# Altium PCB Board.PcbDoc (part 1 of 2)
Units mm, origin at the board's own origin, x right, y up, seen from the top; angles counter-clockwise.
Board outline 55 x 40 mm, 4 copper layers (Top Layer, Internal Plane 1, Internal Plane 2, Bottom Layer), stack 1.641 mm thick; 72 components, 51 nets, 279 pads, 135 vias.
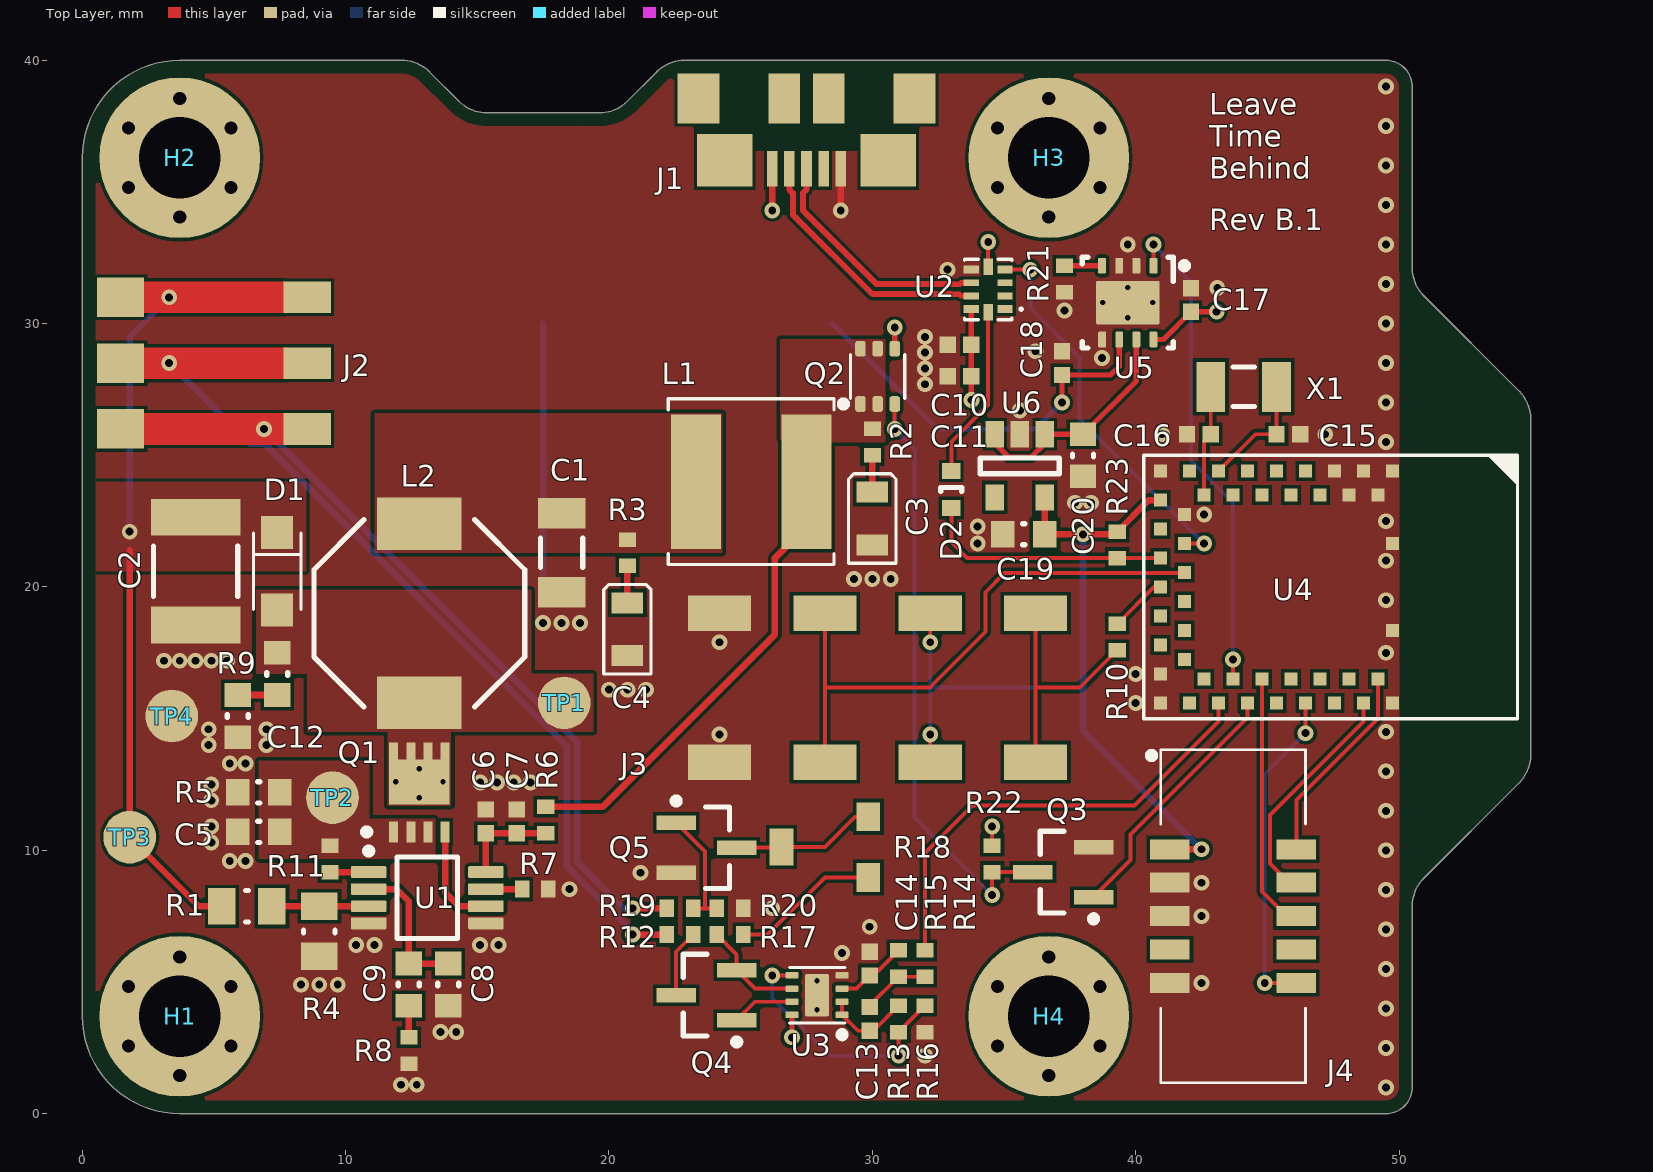
[diagram p0: Top Layer view]
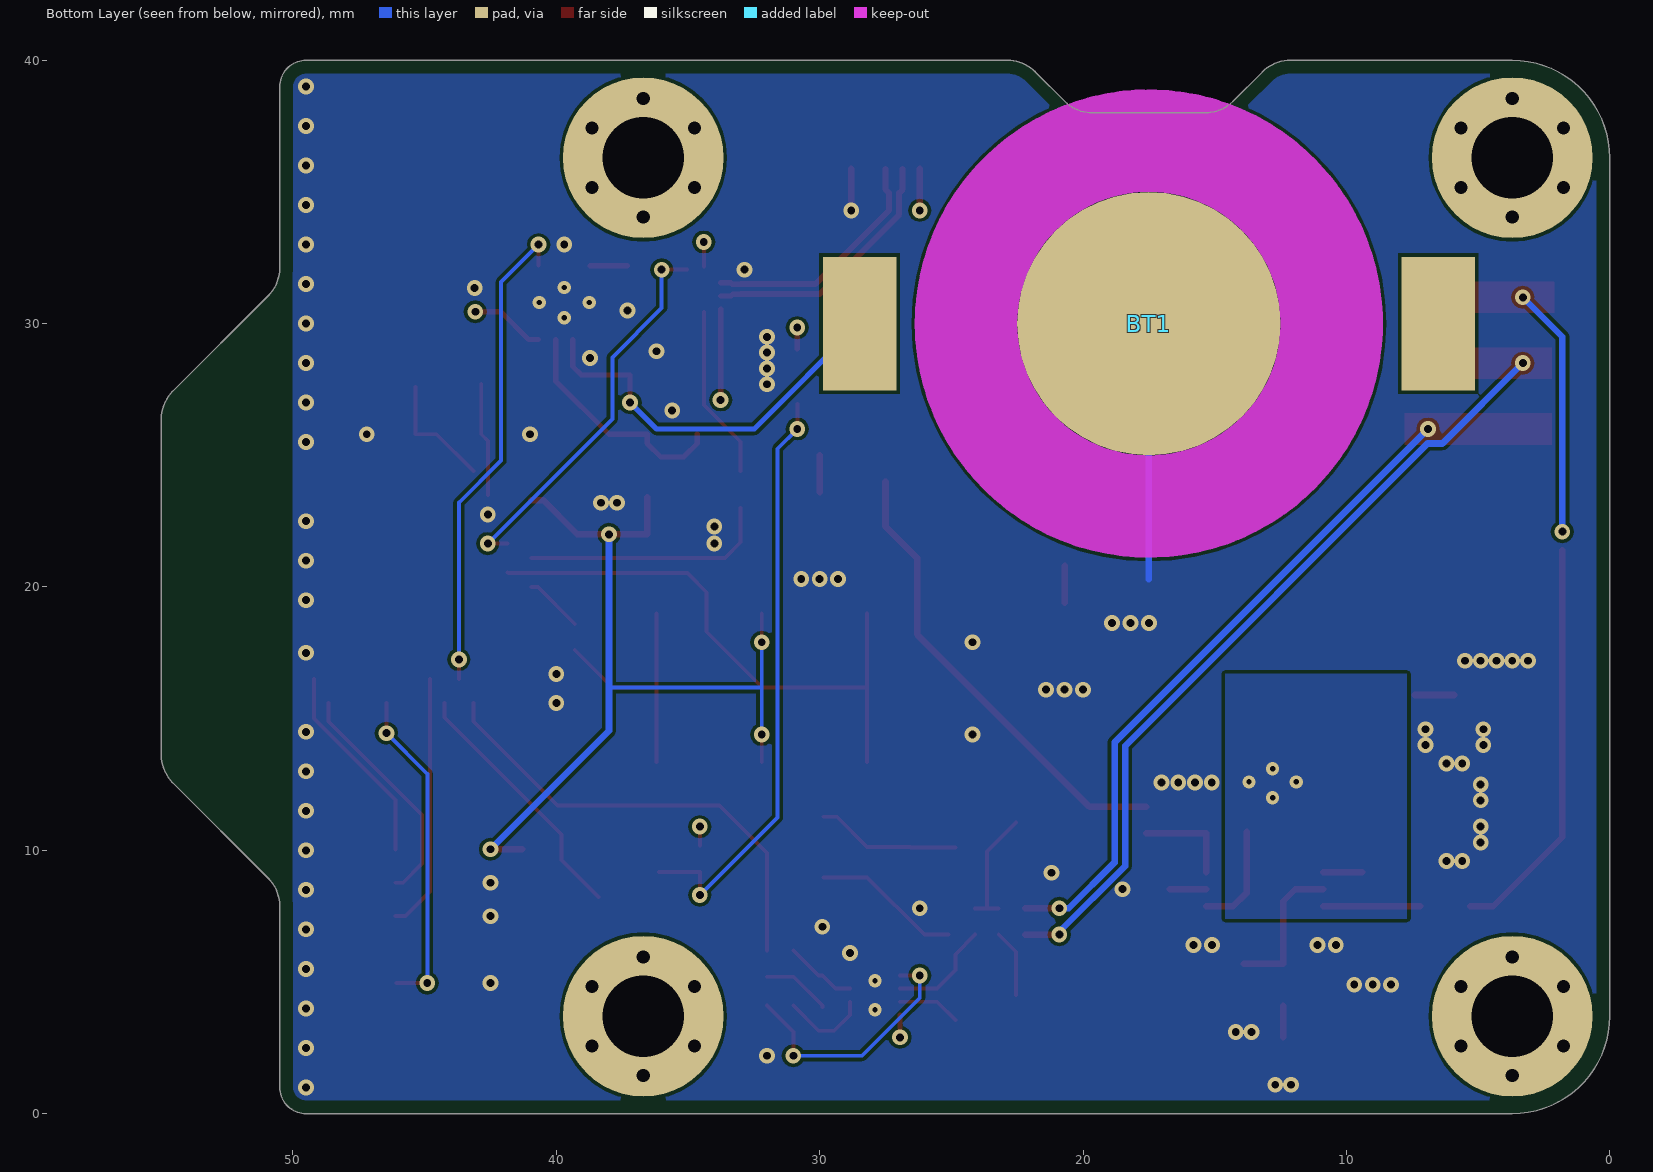
[diagram p1: Bottom Layer view, seen from below]
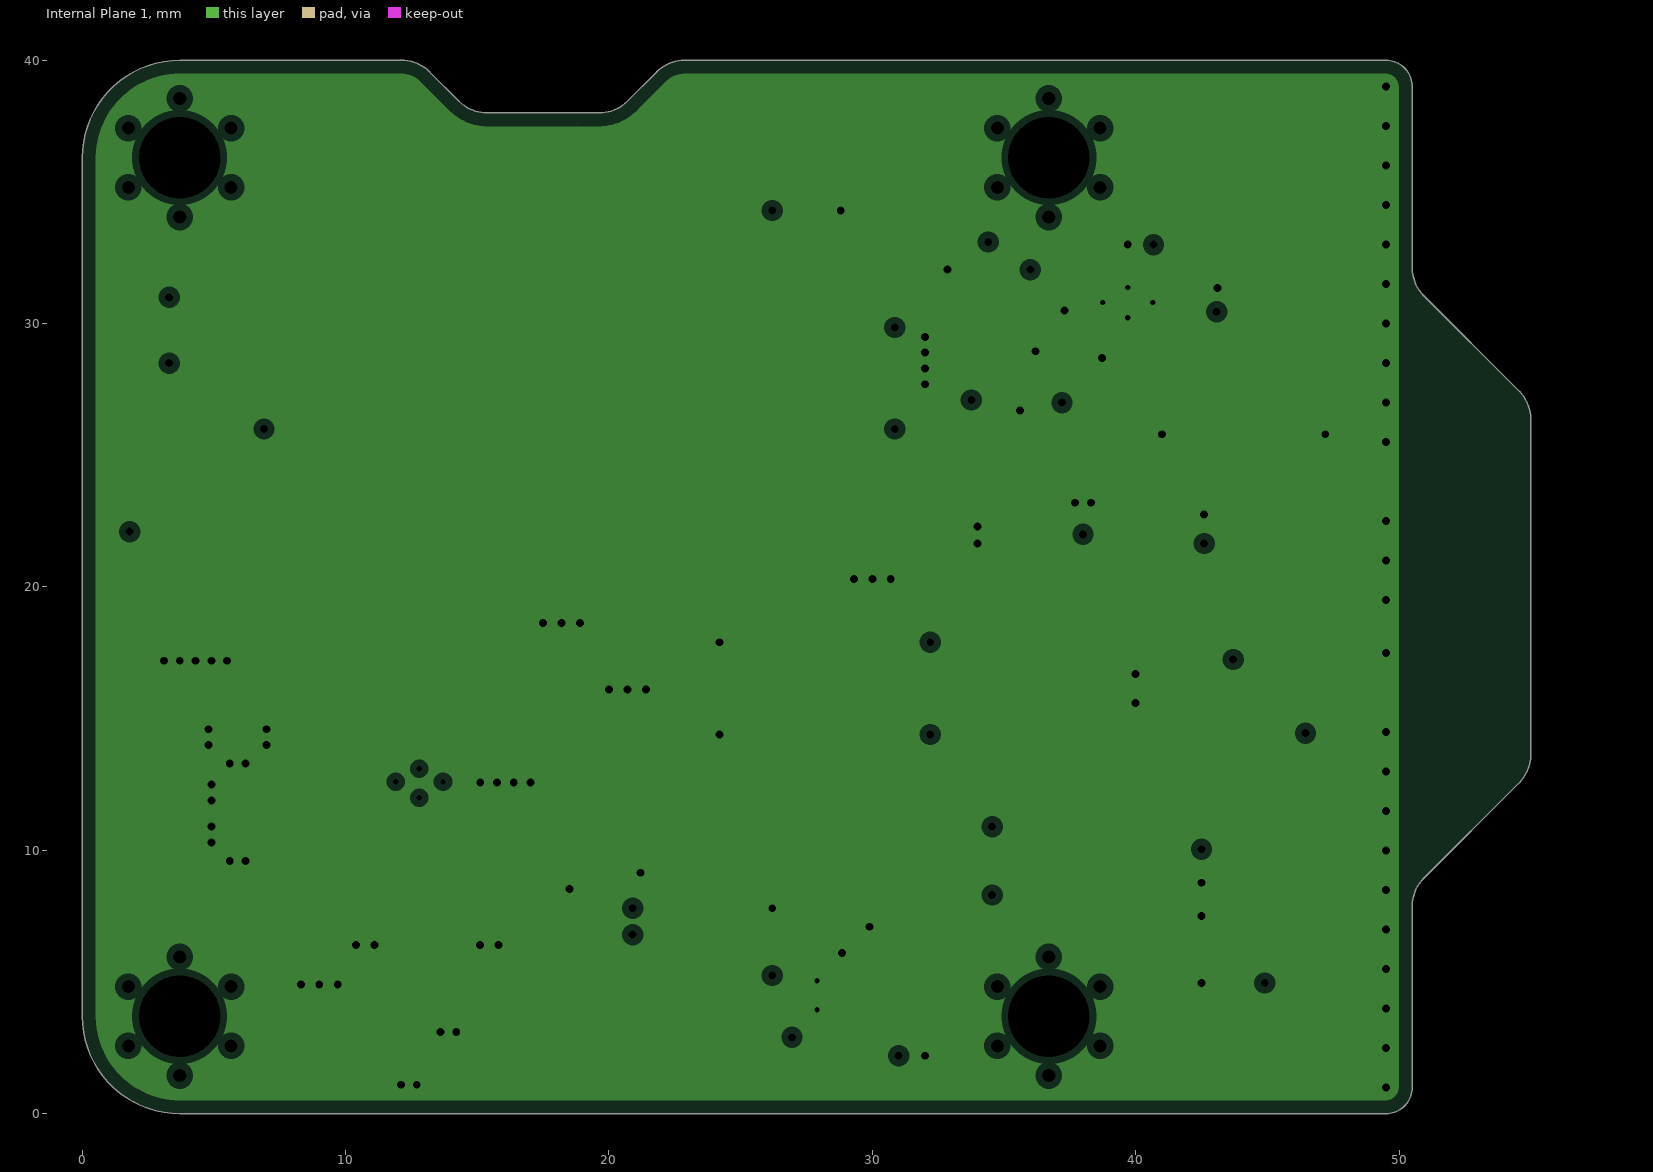
[diagram p2: Internal Plane 1, clearances drawn from the general rule]
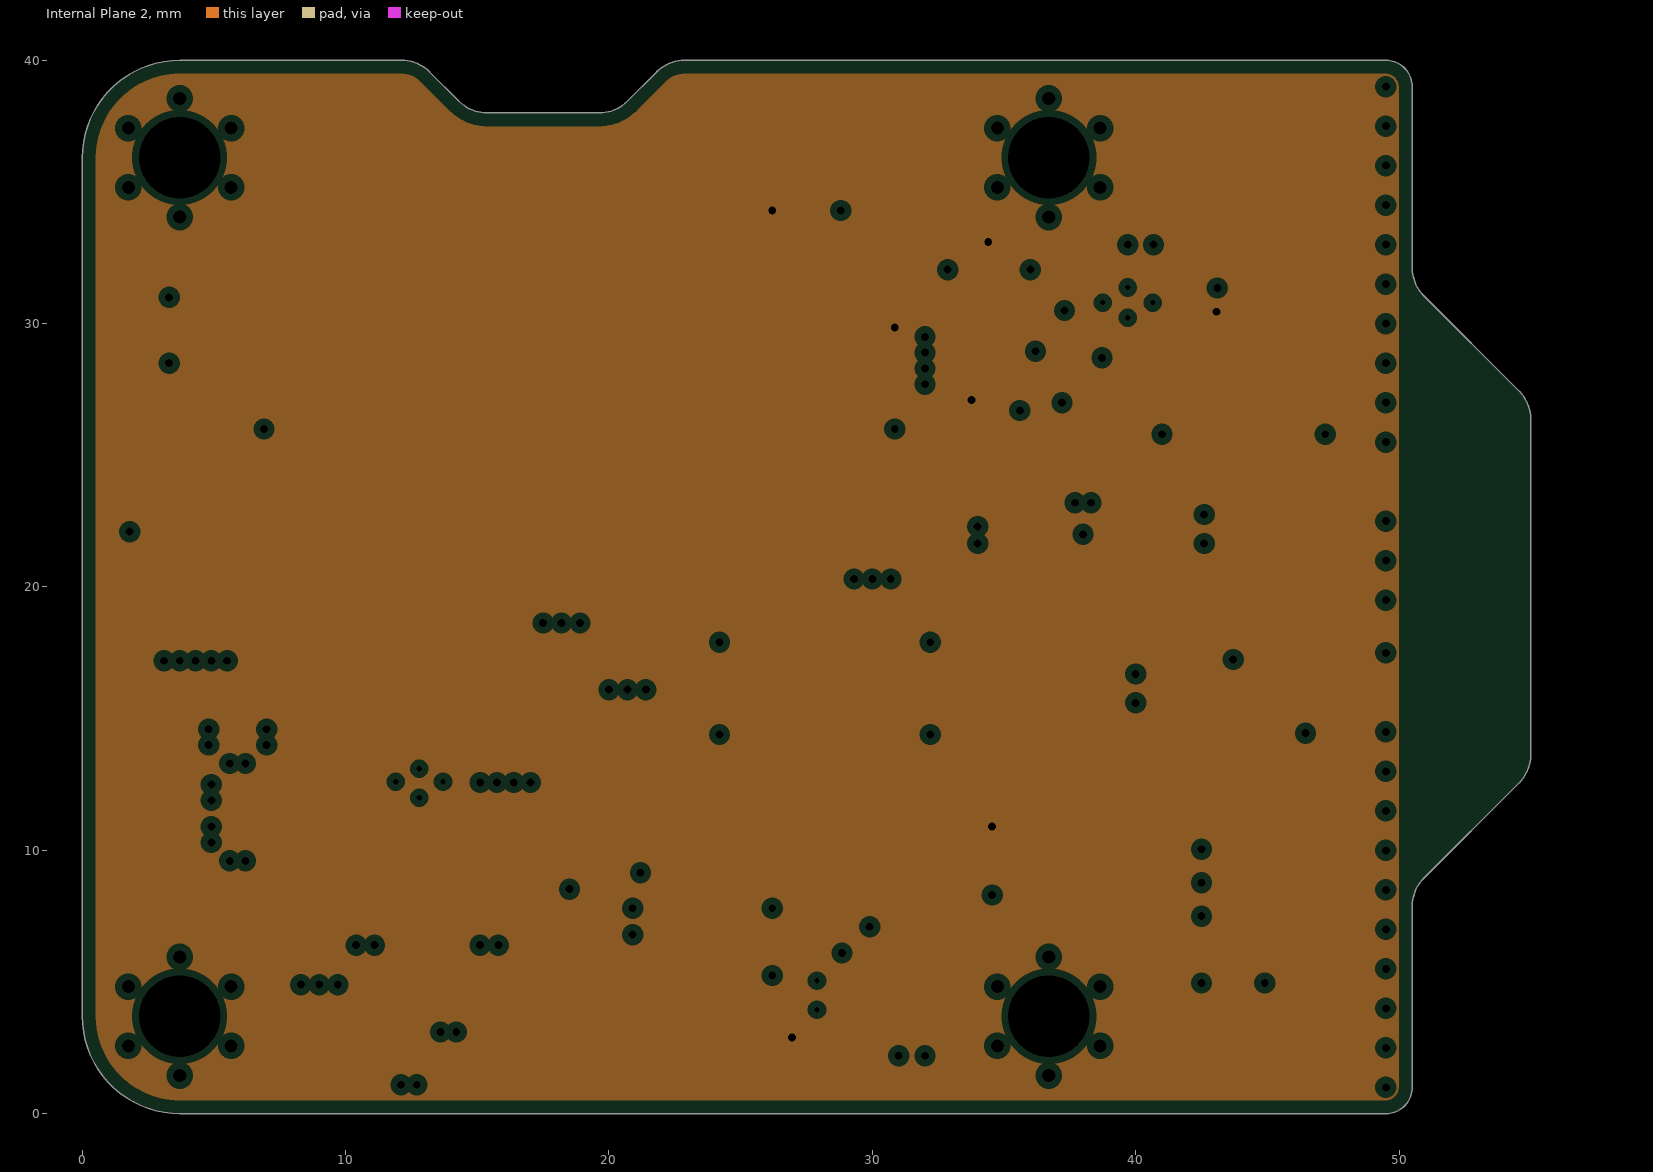
[diagram p3: Internal Plane 2, clearances drawn from the general rule]

## Layer stack, top to bottom
Top Solder: solder mask 0.0254, Solder Resist, Dk 3.5
Top Layer: signal copper 0.0356
Prepreg 1: prepreg 0.1702, FR-408, Dk 3.66
Internal Plane 1: plane copper 0.0178, net GND
Dielectric 1: core 1.1938, FR-408, Dk 3.66
Internal Plane 2: plane copper 0.0178, net Vbus
Prepreg 2: prepreg 0.1702, FR-408, Dk 3.66
Bottom Layer: signal copper 0.0356
Bottom Solder: solder mask 0.0254, Solder Resist, Dk 3.5

## Board outline
0,3.7 ccw(c3.7,3.7) 3.7,0 49.5,0 ccw(c49.5,1) 50.5,1 50.5,7.879 cw(c52,7.879) 50.94,8.939 54.561,12.561 ccw(c53.5,13.621) 55,13.621 55,26.379 ccw(c53.5,26.379) 54.561,27.439 50.94,31.061 cw(c52,32.121) 50.5,32.121 50.5,39 ccw(c49.5,39) 49.5,40 22.872,40 ccw(c22.872,38.5) 21.811,39.561 20.69,38.439 cw(c19.629,39.5) 19.629,38 15.372,38 cw(c15.372,39.5) 14.311,38.439 13.19,39.561 ccw(c12.129,38.5) 12.129,40 3.7,40 ccw(c3.7,36.3) 0,36.3

## Design rules (kind name [scope] priority, off if disabled: settings)
BoardOutlineClearance [All] p1: gap=0.5 ignorepadtopadclearanceinfootprint=FALSE
Clearance [All] p1: gap=0.127 ignorepadtopadclearanceinfootprint=FALSE except(0: Text-Text)
DiffPairsRouting [InDifferentialPair('USBD')] p1: maxlimit=0.203 minlimit=0.127 mostfreqgap=0.152 toplayer_minwidth=0.203 toplayer_maxwidth=0.254 toplayer_prefwidth=0.229 bottomlayer_minwidth=0.203 bottomlayer_maxwidth=0.254 bottomlayer_prefwidth=0.229 maxuncoupledlength=12.7
HoleSize [All] p1: absolutevalues=TRUE maxlimit=6.3 minlimit=0.2 maxpercent=80.000 minpercent=20.000
MinimumAnnularRing [All] p1: minimumring=0.076
MinimumSolderMaskSliver [All] p1: minsoldermaskwidth=0.102
PlaneClearance [All] p1: clearance=0.254
PlaneConnect [All] p1: pad.planeconnectstyle=Relief pad.reliefexpansion=0.508 pad.reliefentries=4 pad.reliefconductorwidth=0.254 pad.reliefairgap=0.254 via.planeconnectstyle=Direct via.reliefexpansion=0.508 via.reliefentries=4 via.reliefconductorwidth=0.254 via.reliefairgap=0.254
PolygonConnect [All] p1: thpad.connectstyle=Relief thpad.reliefconductorwidth=0.254 thpad.reliefentries=4 thpad.polygonreliefangle="45 Angle" thpad.airgapwidth=0.254 smdpad.connectstyle=Direct smdpad.reliefconductorwidth=0.254 smdpad.reliefentries=4 smdpad.polygonreliefangle="90 Angle" smdpad.airgapwidth=0.254 via.connectstyle=Direct via.reliefconductorwidth=0.254 via.reliefentries=4 via.polygonreliefangle="90 Angle" via.airgapwidth=0.254
RoutingVias [All] p1: holewidth=0.3 width=0.6 viastyle="Through Hole" minholewidth=0.2 minwidth=0.45 maxholewidth=6.3 maxwidth=1.27
SilkToSilkClearance [All] p1: silktosilkclearance=0.1
SilkToSolderMaskClearance [IsPad] p1: minsilkscreentomaskgap=0.1 clearancetoexposedcopper=TRUE
SolderMaskExpansion [All] p1: expansion=0.05
Width "Power nets" [InNetClass('Power')] p1: maxlimit=2.54 minlimit=0.127 preferedwidth=0.25 minimp=50.000000 maximp=50.000000 favimp=50.000000
Width "Logic nets" [InComponentClass('Driver') AND NOT InNetClass('Power')] p2: maxlimit=2.54 minlimit=0.127 preferedwidth=0.15 minimp=50.000000 maximp=50.000000 favimp=50.000000
Width [All] p3: maxlimit=2.54 minlimit=0.127 preferedwidth=0.2 minimp=50.000000 maximp=50.000000 favimp=50.000000
23 further rules are at their usual default settings.

## Classes and differential pairs
component class "Power supply": C1 C2 C3 C4 C5 C6 C7 C8 C9 C10 C11 C12 D1 L1 L2 Q1 Q2 Q3 R1 R2 R3 R4 R5 R6 R7 R8 R9 R11 R22 U1 U2
component class MCU: BT1 C15 C16 C17 C18 C19 C20 D2 R10 R21 R23 U4 U5 U6 X1
component class Driver: C13 C14 Q4 Q5 R12 R13 R14 R15 R16 R17 R18 R19 R20 U3
component class "Board connectors": H1 H2 H3 H4 J1 J2 J3 J4 TP1 TP2 TP3 TP4
differential pair USBD: +USBD_P -USBD_N

## Components (designator, comment, footprint, x,y, rotation, side; value= is the part's Value field where it differs from the comment)
BT1 "CR2032" BK-912 17.5,30 r0 bottom
C1 "10u" CAPC1206(3216)190_N 18.2,21.3 r90 top
C2 "100n" CAPC1812(4532)230_N 4.3,20.6 r90 top
C3 "22u" "KEMET A" 30,22.6 r270 top
C4 "100u" "KEMET A" 20.7,18.4 r270 top
C5 "100n" CAPC0603(1608)100_N 6.7,10.7 r0 top
C6 "100n" CAPC0402(1005)33_N 15.325,11.1 r270 top
C7 "1u" CAPC0402(1005)33_N 16.5,11.1 r270 top
C8 "DNP" CAPC0603(1608)100_N 13.9,4.9 r90 top
C9 "5.6n" CAPC0603(1608)100_N 12.4,4.9 r90 top
C10 "100n" CAPC0402(1005)33_N 33.31,28 r0 top
C11 "1u" CAPC0402(1005)33_N 33.31,29.2 r0 top
C12 "100p" CAPC0603(1608)100_N 5.9,15.1 r90 top
C13 "100n" CAPC0402(1005)60_N 29.9,3.6 r270 top
C14 "47n" CAPC0402(1005)60_N 29.9,5.7 r270 top
C15 "12p" CAPC0402(1005)60_N 45.8,25.8 r180 top
C16 "12p" CAPC0402(1005)60_N 42.4,25.8 r0 top
C17 "100n" CAPC0402(1005)33_N 42.1,30.9 r270 top
C18 "100n" CAPC0402(1005)33_N 37.2,28.5 r270 top
C19 "10u" CAPC0603(1608)100_N 35.75,22 r0 top
C20 "1u" CAPC0603(1608)100_N 38,25 r90 top
D1 "MBR2H200SF" SOD-123FL 7.4,20.6 r270 top
D2 "RB521S30" SOD-523 33,23.7 r270 top
H1 "M3 PLATED TIGHT FIT PAN HEAD" "M3 PLATED TIGHT PAN HEAD" 3.7,3.7 r0 top
H2 "M3 PLATED TIGHT FIT PAN HEAD" "M3 PLATED TIGHT PAN HEAD" 3.7,36.3 r0 top
H3 "M3 PLATED TIGHT FIT PAN HEAD" "M3 PLATED TIGHT PAN HEAD" 36.7,36.3 r0 top
H4 "M3 PLATED TIGHT FIT PAN HEAD" "M3 PLATED TIGHT PAN HEAD" 36.7,3.7 r0 top
J1 "ZX62R-B-5P(30)" HRS_ZX62R-B-5P(30)_ZX62R-B-5P(30)(PRIMARY) 27.5,38.55 r180 top
J2 "009276003021106" 009276003021106 5,28.5 r270 top
J3 "009296004553906" 009296004553906 30.2,16.175 r180 top
J4 "3220-10-0300-00" 3220-10-0300-00 43.7,7.5 r0 top
L1 "10u" VLS6045EX 25.4,24 r180 top
L2 "15u" SRU8043 12.8,19 r270 top
Q1 "BSZ900N20NS3" PG-TSDSON-8 12.8,12.2 r90 top
Q2 "MCH6351-TL-W" SOT23-6P65_210X90L25X32 30.2,28 r0 top
Q3 "BSR202N" INF-PG-SC59_N 37.25,9.175 r180 top
Q4 "BSR606N" INF-PG-SC59_N 23.7,4.5 r180 top
Q5 "BSR606N" INF-PG-SC59_N 23.7,10.1 r0 top
R1 "1.5M" RESC0805(2012)_N 6.25,7.875 r180 top
R2 "500m" RESC0402(1005)_N 30,25.5 r90 top
R3 "200m" RESC0402(1005)_N 20.7,21.3 r90 top
R4 "12.7k" RESC0805(2012)_N 9,6.925 r90 top
R5 "39m" RESC0603(1608)_N 6.7,12.2 r0 top
R6 "20" RESC0402(1005)_N 17.6,11.15 r90 top
R7 "180k" RESC0402(1005)_N 17.2,8.525 r180 top
R8 "4.3k" RESC0402(1005)_N 12.4,2.4 r90 top
R9 "5.62" RESC0603(1608)_N 7.4,16.7 r90 top
R10 "220" RESC0402(1005)_N 39.3,18.1 r90 top
R11 "470" RESC0402(1005)_N 9.4,9.675 r90 top
R12 "3k" RESC0402(1005)_N 22.7,6.8 r180 top
R13 "18k" RESC0402(1005)_N 31,3.6 r270 top
R14 "300k" RESC0402(1005)_N 32,5.7 r270 top
R15 "180k" RESC0402(1005)_N 31,5.7 r90 top
R16 "2k" RESC0402(1005)_N 32,3.6 r90 top
R17 "68" RESC0402(1005)_N 24.6,6.8 r180 top
R18 "20" PVG3A 28.2,10.125 r90 top
R19 "330k" RESC0402(1005)_N 22.7,7.8 r180 top
R20 "30k" RESC0402(1005)_N 24.6,7.8 r180 top
R21 "2k" RESC0402(1005)_N 37.3,31.7 r90 top
R22 "100k" RESC0402(1005)_N 34.55,9.675 r90 top
R23 "100k" RESC0402(1005)_N 39.3,21.6 r90 top
TP1 "SMD test point" "2MM SMD TEST POINT" 18.3,15.6 r0 top
TP2 "SMD test point" "2MM SMD TEST POINT" 9.5,12 r0 top
TP3 "SMD test point" "2MM SMD TEST POINT" 1.8,10.5 r0 top
TP4 "SMD test point" "2MM SMD TEST POINT" 3.4,15.1 r0 top
U1 "LM3478MM/NOPB" DGK0008A_N 13.1,8.2 r0 top
U2 "BQ24392RSER" QFN50P200X150X60-10N 34.4,31.3 r180 top value=Value
U3 "TLV9062" WSON-8 27.9,4.5 r90 top
U4 "BMD-300" BMD-300 41.85,17.25 r180 top locked
U5 "TPS2113ADRBR" VSON-8 39.7,30.8 r270 top
U6 "NCP114-3.3V" TSOP-5 35.6,24.6 r270 top
X1 "32.768kHz" "3215 XTAL" 44.1,27.6 r0 top

## Footprints (in the part's own frame and the unit in brackets; to place one, negate y for a bottom-side part, rotate by r counter-clockwise, add the part's x,y. Pads: shape width x height; smd on the part's side, far side on the other; paste and mask are expansions set on the pad)
"2MM SMD TEST POINT" [mm]
  round 2 smd paste-2: 1(0,0)
"3215 XTAL" [mm]
  rect 1.1x1.9 smd: 1(-1.25,0) 2(1.25,0)
  silkscreen extent -0.4,-0.75 0.4,0.75, body extent -1.6,-0.75 1.6,0.75, height 0.81
3220-10-0300-00 [mm] "IDC BOX HEADER, SMT, 0.050\" (1.27MM), 10 CONTACTS"
  rect 1.5x0.76 smd: 1(-2.4,2.54) 2(2.4,2.54) 3(-2.4,1.27) 4(2.4,1.27) 5(-2.4,0) 6(2.4,0) 7(-2.4,-1.27) 8(2.4,-1.27) 9(-2.4,-2.54) 10(2.4,-2.54)
  silkscreen extent -3.15,-6.33 2.75,6.32, body extent -2.75,-6.33 2.75,6.32, height 5.6
009276003021106 [mm] "CONN TERM BLOCK 3 POS WTB"
  rect 1.2x1.8 smd: 1(-2.5,3.55) 2(0,3.55) 3(2.5,3.55)
  rect 1.5x1.8 smd: 1(-2.5,-3.55) 2(0,-3.55) 3(2.5,-3.55)
  Top Layer region: 1.9,-2.8 3.1,-2.8 3.1,2.8 1.9,2.8
  Top Layer region: -0.6,-2.8 0.6,-2.8 0.6,2.8 -0.6,2.8
  Top Layer region: -3.1,-2.9 -1.9,-2.9 -1.9,2.7 -3.1,2.7
  body extent -3.7,-4.7 3.8,4.3, height 5.1
009296004553906 [mm] "CONN 4POS SMD 18-26AWG"
  rect 2.4x1.35 smd: 1(-6,-2.825) 1(-6,2.825) 2(-2,2.825) 2(-2,-2.825) 3(2,2.825) 3(2,-2.825) 4(6,-2.825) 4(6,2.825)
  body extent -8,-3.3 8,3.3, height 9
BK-912 [mm]
  rect 2.79x5.08 smd: 1(-10.985,0) 1(10.985,0)
  round 10 smd paste-20 mask+3.89: 2(0,0)
  Top Layer keep-out circle w3.89: c0,0 r6.945
  body extent -11.43,-7.88 11.43,7.37, height 4.32
BMD-300 [mm] "BMD-300, LGA, 47pin ,1.1mm Pitch, 14mm x 9.8mm"
  rect 0.49x0.49 smd: 1(-7.9,-7.15) 2(-7.35,-6.25) 3(-6.8,-7.15) 4(-6.25,-6.25) 5(-5.7,-7.15) 6(-5.15,-6.25) 7(-4.6,-7.15) 8(-4.05,-6.25) 9(-3.5,-7.15) 10(-2.95,-6.25) 11(-2.4,-7.15) 12(-1.85,-6.25) 13(-1.3,-7.15) 14(-0.75,-6.25) 15(-0.2,-7.15) 16(0.9,-7.15) 17(0.9,-6.05) 18(0,-5.5) 19(0.9,-4.95) 20(0,-4.4) 21(0.9,-3.85) 22(0,-3.3) 23(0.9,-2.75) 24(0,-2.2) 25(0.9,-1.65) 26(0,-1.1) 27(0.9,-0.55) 28(0,0) 29(0.9,0.55) 30(0.9,1.65) 31(-0.2,1.65) 32(-0.75,0.75) 33(-1.3,1.65) 34(-1.85,0.75) 35(-2.4,1.65) 36(-2.95,0.75) 37(-3.5,1.65) 38(-4.05,0.75) 39(-4.6,1.65) 40(-5.15,0.75) 41(-5.7,1.65) 42(-6.25,0.75) 43(-6.8,1.65) 44(-7.35,0.75) 45(-7.9,1.65) 46(-7.9,-1.1) 47(-7.9,-4.4)
  Multi-Layer pour cut-out: -8.15,-7.65 -8.15,2.15 -12.55,2.15 -12.55,-7.65
  silkscreen extent -12.65,-7.75 1.55,2.25, body extent -12.55,-7.65 1.45,2.15, height 1.89
CAPC0402(1005)33_N [mm] "Chip Capacitor, Body 1.0x0.5mm, Height 0.33mm, IPC Medium Density"
  rect 0.62x0.62 smd: 1(-0.45,0) 2(0.45,0)
  body extent -0.55,-0.3 0.55,0.3, height 0.33
CAPC0402(1005)60_N [mm] "Chip Capacitor, Body 1.0x0.5mm, Height 0.6mm, IPC Medium Density"
  rect 0.62x0.62 smd: 1(-0.45,0) 2(0.45,0)
  body extent -0.55,-0.3 0.55,0.3, height 0.6
CAPC0603(1608)100_N [mm]
  rect 0.9x1 smd: 1(-0.8,0) 2(0.8,0)
  silkscreen extent -0.05,-0.4 0.05,0.4, body extent -0.87,-0.48 0.88,0.47, height 1
CAPC1206(3216)190_N [mm] "Chip Capacitor, Body 3.2x1.6mm, Height 1.9mm, IPC Medium Density"
  rect 1.15x1.8 smd: 1(-1.5,0) 2(1.5,0)
  silkscreen extent -0.55,-0.8 0.55,0.8, body extent -1.7,-0.9 1.7,0.9, height 1.9
CAPC1812(4532)230_N [mm] "Chip Capacitor, Body 4.5x3.2mm, Height 2.3mm, IPC Medium Density"
  rect 1.4x3.4 smd: 1(-2.05,0) 2(2.05,0)
  silkscreen extent -0.95,-1.6 0.95,1.6, body extent -2.4,-1.7 2.4,1.7, height 2.3
DGK0008A_N [mm] "TSOP, 8-Leads, Body 3.1x3.1mm, Pitch 0.65mm, IPC Medium Density"
  rrect22% 1.35x0.45 smd: 1(-2.225,0.975) 2(-2.225,0.325) 3(-2.225,-0.325) 4(-2.225,-0.975) 5(2.225,-0.975) 6(2.225,-0.325) 7(2.225,0.325) 8(2.225,0.975)
  silkscreen extent -2.35,-1.55 1.15,1.9, body extent -2.45,-1.5 2.45,1.5, height 0.94
HRS_ZX62R-B-5P(30)_ZX62R-B-5P(30)(PRIMARY) [mm]
  rect 0.4x1.35 smd: 1(1.3,2.675) 2(0.65,2.675) 3(0,2.675) 4(-0.65,2.675) 5(-1.3,2.675)
  rect 2.1x2 smd: S1(-3.1,2.35) S2(3.1,2.35)
  rect 1.6x1.9 smd: S3(4.1,0) S6(-4.1,0)
  rect 1.2x1.9 smd: S4(0.85,0) S5(-0.85,0)
  Top Layer pour cut-out: -3.75,-1.45 -3.75,2 3.75,2 3.75,-1.45
  body extent -4.4,-2.7 4.4,3.03, height 2.76
INF-PG-SC59_N [mm] "SOT23, 3-Leads, Body 3x1.53mm, Pitch 0.95mm, IPC Medium Density"
  rect 1.5x0.55 smd: 1(-1.15,0.95) 2(-1.15,-0.95) 3(1.15,0)
  silkscreen extent -1.28,-1.55 0.87,1.9, body extent -0.87,-1.55 0.87,1.55, height 1.35
"KEMET A" [mm]
  rect 0.8x1.2 smd: 1(-1,0) 2(1,0)
  silkscreen extent -1.7,-0.9 1.7,0.9, body extent -1.7,-0.9 1.7,0.9, height 1.8
"M3 PLATED TIGHT PAN HEAD" [mm] "M3 x 0.5mm plated tight fit pan head"
  round 0.5 hole 0.5: ""(-1.95,-1.125) ""(-1.95,1.125) ""(0,-2.25) ""(0,2.25) ""(1.95,-1.125) ""(1.95,1.125)
  round 6.1 hole 3.1 paste+0: ""(0,0)
PG-TSDSON-8 [mm] "PG-TSDSON-8"
  rect 0.8x0.34 smd: 1(-1.5,0.975) 2(-1.5,0.325) 3(-1.5,-0.325) 4(-1.5,-0.975)
  rect 0.65x0.34 smd: 5(1.575,-0.975) 6(1.575,-0.325) 7(1.575,0.325) 8(1.575,0.975)
  rect 1.71x2.29 smd paste-2: 9(0.395,0)
  silkscreen extent -1.62,1.88 -1.38,2.12, body extent -1.65,-1.65 1.65,1.65, height 4.85
PVG3A [mm] "SMD Sealed Type Single-Turn PVG3"
  rect 1.1x0.9 smd: 1(1.15,-1.65) 3(-1.15,-1.65)
  rect 1.4x0.9 smd: 2(0,1.65)
  body extent -1.8,-1.8 1.8,1.8, height 1.94
QFN50P200X150X60-10N [mm]
  rect 0.58x0.3 smd: 1(-0.64,0.75) 4(-0.64,-0.75) 6(0.64,-0.75) 9(0.64,0.75)
  rect 0.58x0.25 smd: 2(-0.64,0.25) 3(-0.64,-0.25) 7(0.64,-0.25) 8(0.64,0.25)
  rect 0.35x0.63 smd: 5(0,-0.86) 10(0,0.86)
  silkscreen extent -1.3,-1.15 0.9,1.15, body extent -0.75,-1 0.75,1, height 0.55
RESC0402(1005)_N [mm] "Chip Resistor, Body 1.0x0.5mm, IPC Medium Density"
  rect 0.55x0.65 smd: 1(-0.5,0) 2(0.5,0)
  body extent -0.52,-0.27 0.53,0.28, height 0.4
RESC0603(1608)_N [mm] "Chip Resistor, Body 1.6x0.8mm, IPC Medium Density"
  rect 0.9x1 smd: 1(-0.8,0) 2(0.8,0)
  silkscreen extent -0.05,-0.4 0.05,0.4, body extent -0.85,-0.47 0.85,0.47, height 0.6
RESC0805(2012)_N [mm] "Chip Resistor, Body 2.0x1.3mm, IPC Medium Density"
  rect 1.05x1.4 smd: 1(-0.95,0) 2(0.95,0)
  silkscreen extent -0.05,-0.6 0.05,0.6, body extent -1.1,-0.67 1.1,0.68, height 0.7
SOD-123FL [mm]
  rect 1.25x1.22 smd: A(1.475,0) K(-1.475,0)
  silkscreen extent -1.45,-0.9 1.45,0.9, body extent -1.8,-0.82 1.8,0.83, height 0.98
SOD-523 [mm] "SOD, 2-Leads, Body 1.2x0.8mm"
  rect 0.6x0.7 smd: 1(-0.7,0) 2(0.7,0)
  silkscreen extent -0.07,-0.4 0.07,0.4, body extent -0.6,-0.4 0.6,0.4, height 0.7
SOT23-6P65_210X90L25X32 [mm]
  rrect50% 0.4x0.6 smd: 1(-0.65,-1.05) 2(0,-1.05) 3(0.65,-1.05) 4(0.65,1.05) 5(0,1.05) 6(-0.65,1.05)
  silkscreen extent -1.42,-1.17 1.03,0.83, body extent -1,-1.1 1,1.1, height 0.9
SRU8043 [mm]
  rect 2x3.2 smd: 1(-3.4,0) 2(3.4,0)
  silkscreen extent -3.56,-4 3.56,4, body extent -4,-4 4,4, height 5.2
TSOP-5 [mm] "SOP, 5-Leads, Body 3x1.5mm, Pitch 0.95mm"
  rect 1x0.7 smd: 1(-1.2,0.95) 2(-1.2,0) 3(-1.2,-0.95) 4(1.2,-0.95) 5(1.2,0.95)
  silkscreen extent -0.3,-1.5 0.3,1.5, body extent -0.75,-1.5 0.75,1.5, height 1.1
VLS6045EX [mm]
  rect 1.9x5.1 smd: 1(-2.1,0) 2(2.1,0)
  silkscreen extent -3.15,-3.15 3.15,3.15, body extent -3,-3 3,3, height 4.53
VSON-8 [mm] "SON, 8-Leads, Body 3x3mm, Pitch 0.65mm, Thermal Pad 2.4x1.65mm, TI Recommended"
  rrect33% 0.6x0.3 smd: 1(-1.4,0.975) 2(-1.4,0.325) 3(-1.4,-0.325) 4(-1.4,-0.975) 5(1.4,-0.975) 6(1.4,-0.325) 7(1.4,0.325) 8(1.4,0.975)
  rrect6% 1.65x2.4 smd paste-1.2: 9(0,0)
  silkscreen extent -1.73,-1.73 1.73,2.28, body extent -1.5,-1.5 1.5,1.5, height 0.96
WSON-8 [mm] "WSON-8"
  rrect40% 0.25x0.5 smd mask+0.07: 1(-0.75,-0.95) 2(-0.25,-0.95) 3(0.25,-0.95) 4(0.75,-0.95) 5(0.75,0.95) 6(0.25,0.95) 7(-0.25,0.95) 8(-0.75,0.95)
  rrect11% 1.6x0.9 smd paste-1 mask+0.07: 9(0,0)
  silkscreen extent -1.62,-1.08 1.05,1.05, body extent -1,-1.05 1,1.05, height 0.77

## Part data
BT1: library part BK-912, "BATTERY RETAINER COIN 20MM SMD", Case/Package=SMD/SMT, Manufacturer="Memory Protection Devices", Manufacturer Part Number=BK-912-TR, Package Quantity=700, Supplier Part Number 1=BK-912-CT-ND, ComponentLink1Description=https://media.digikey.com/pdf/Data%20Sheets/Memory%20Protection%20PDFs/Coin_Cell_Guide.pdf, ComponentLink1URL=https://media.digikey.com/pdf/Data%20Sheets/Memory%20Protection%20PDFs/Coin_Cell_Guide.pdf, Mount="PCB,Surface Mount", Number of Cells=1, Pricing 1="1=0.73, 10=0.661, 100=0.5138 (USD)", Stock 1=39032, Supplier 1=Digi-Key, Termination=SMD/SMT
C1: library part C3216X7R1E106K160AB, "CAP CER 10UF 25V X7R 1206", Manufacturer="TDK Corporation", Operating Temperature="-55°C ~ 125°C", Package / Case="1206 (3216 Metric)", Ratings=-, Supplier Part Number 1=445-7705-1-ND, Temperature Coefficient=X7R, Tolerance=±10%, Voltage - Rated=25V, Applications="General Purpose", Category=Capacitors, ComponentLink1Description=https://product.tdk.com/info/en/catalog/datasheets/mlcc_commercial_general_en.pdf, ComponentLink1URL=https://product.tdk.com/info/en/catalog/datasheets/mlcc_commercial_general_en.pdf, Failure Rate=-, Features="Low ESL", Height - Seated (Max)=-, Lead Spacing=-, Lead Style=-, Manufacturer Part Number=C3216X7R1E106K160AB, Mounting Type="Surface Mount, MLCC", Notification="Current market demand for these product types have resulted in fluctuating and extending lead times. Lead times may differ.", Packaging="Cut Tape (CT)", Part Status=Active, Pricing 1="1=0.83, 10=0.589, 100=0.3881, 500=0.2875, 1000=0.24438 (USD)", RoHS="RoHS Compliant", Size / Dimension="0.126\" L x 0.063\" W (3.20mm x 1.60mm)", Stock 1=20000, Supplier 1=Digi-Key, Supplier 2=Mouser, Supplier Part Number 2=810-C3216X7R1E106K, Thickness (Max)="0.075\" (1.90mm)"
C2: library part C1812C104J2GACAUTO, "KEMET         C1812C104J2GACAUTO            SMD Multilayer Ceramic Capacitor, AEC-Q200 C Series, 0.1 F,  5%, C0G / NP0, 200 V", Capacitance=100nF, Case/Package=1812, Case Code (Metric)=4532, Dielectric=C0G, Dielectric Material=Ceramic, Manufacturer=KEMET, Max Operating Temperature=125°C, Min Operating Temperature=-55°C, Package Quantity=500, Ratings=AEC-Q200, Supplier Part Number 1=399-11585-1-ND, Temperature Coefficient=30ppm/°C, Tolerance=5%, Voltage=200V, Case Code (Imperial)=1812, ComponentLink1Description=http://www.farnell.com/datasheets/1929048.pdf, ComponentLink1URL=http://www.farnell.com/datasheets/1929048.pdf, Depth=3.2mm, Height=2mm, Lead Free="Lead Free", Length=4.5mm, Manufacturer Part Number=C1812C104J2GACAUTO, Mount="Surface Mount", Packaging="Tape and Reel", Pricing 1="1=2.08, 10=1.679, 100=1.2824 (USD)", REACH SVHC="No SVHC", Stock 1=5000, Supplier 1=Digi-Key, Termination=SMD/SMT, Thickness=0.087inch, Voltage Rating=200V, Voltage Rating (DC)=200V, Weight=0.000952oz, Width=3.2mm
C3: library part T520A226M006ATE100, "CAP TANT POLY 22UF 6.3V 1206", Supplier Part Number 1=399-5271-1-ND, Supplier 1=Digi-Key, Supplier 2=Mouser, Supplier Part Number 2=80-T520A226M6ATE100
C4: library part T520A107M006ATE045, "POLY TA SMD 3216 100UF 6.3V 20%", Supplier Part Number 1=399-18160-1-ND, Supplier 1=Digi-Key, Supplier 2=Mouser, Supplier Part Number 2=80-T520A107M06ATE045
C5: library part C0603C104K8RACTU, "CAP CER 0.1UF 10V X7R 0603", Capacitance=100nF, Case/Package=0603, Case Code (Metric)=1608, Dielectric=X7R, Dielectric Material=Ceramic, Manufacturer=KEMET, Max Operating Temperature=125°C, Min Operating Temperature=-55°C, Package Quantity=1, Supplier Part Number 1=399-1095-1-ND, Tolerance=10%, Voltage=10V, Case Code (Imperial)=0603, ComponentLink1Description=http://www.farnell.com/datasheets/2315110.pdf, ComponentLink1URL=http://www.farnell.com/datasheets/2315110.pdf, ComponentLink2Description=http://www.kemet.com/kemet/web/homepage/kechome.nsf/vapubfiles/KEM_C1002_X7R_SMD.pdf/$file/KEM_C1002_X7R_SMD.pdf, ComponentLink2URL=http://www.kemet.com/kemet/web/homepage/kechome.nsf/vapubfiles/KEM_C1002_X7R_SMD.pdf/$file/KEM_C1002_X7R_SMD.pdf, ComponentLink3Description=https://www.verical.com/server-webapp/html/getDatasheet?partID=91529, ComponentLink3URL=https://www.verical.com/server-webapp/html/getDatasheet?partID=91529, ComponentLink4Description=http://www.mouser.com/ds/2/212/KEM_C1002_X7R_SMD-1102033.pdf, ComponentLink4URL=http://www.mouser.com/ds/2/212/KEM_C1002_X7R_SMD-1102033.pdf, ComponentLink5Description=http://www.alliedelec.com/m/d/9bfe7773041ffe9d406e68bc7b377fdd.pdf, ComponentLink5URL=http://www.alliedelec.com/m/d/9bfe7773041ffe9d406e68bc7b377fdd.pdf, ComponentLink6Description=http://www.farnell.com/datasheets/1851736.pdf, ComponentLink6URL=http://www.farnell.com/datasheets/1851736.pdf, Contact Plating=Matte,Tin, Depth=0.8mm, Dissipation Factor=5%, Height=0.8mm, Lead Pitch=0.7mm, Length=1.6mm, Manufacturer Part Number=C0603C104K8RACTU, Mount="PCB,Surface Mount", Number of Pins=2, Packaging="Tape and Reel", Pricing 1="1=0.16, 10=0.112, 100=0.0525, 500=0.03682, 1000=0.03049 (USD)", Radiation Hardening=No, REACH SVHC="No SVHC", Stock 1=40000, Supplier 1=Digi-Key, Termination=SMD/SMT, Thickness=0.034inch, Voltage Rating=10V, Voltage Rating (DC)=10V, Width=0.8mm
C6 C10 C17 C18: library part CC0402KRX7R8BB104, "CAP CER 0.1UF 25V X7R 0402", Manufacturer=Yageo, Operating Temperature="-55°C ~ 125°C", Package / Case="0402 (1005 Metric)", Ratings=-, Supplier Part Number 1=311-2077-1-ND, Temperature Coefficient=X7R, Tolerance=±10%, Voltage - Rated=25V, Applications="General Purpose", Category=Capacitors, ComponentLink1Description=http://www.yageo.com/documents/recent/UPY-GPHC_X7R_6.3V-to-50V_18.pdf, ComponentLink1URL=http://www.yageo.com/documents/recent/UPY-GPHC_X7R_6.3V-to-50V_18.pdf, Failure Rate=-, Features=-, Height - Seated (Max)=-, Lead Spacing=-, Lead Style=-, Manufacturer Part Number=CC0402KRX7R8BB104, Mounting Type="Surface Mount, MLCC", Notification="Current market demand for these product types have resulted in fluctuating and extending lead times. Lead times may differ.", Packaging="Cut Tape (CT)", Part Status=Active, Pricing 1="1=0.1, 10=0.048, 100=0.0215, 500=0.01534, 1000=0.01205, 2500=0.01095, 5000=0.01007 (USD)", RoHS="RoHS Compliant", Size / Dimension="0.039\" L x 0.020\" W (1.00mm x 0.50mm)", Stock 1=0, Supplier 1=Digi-Key, Supplier 2=Mouser, Supplier Part Number 2=603-CC402KRX7R8BB104, Thickness (Max)="0.022\" (0.55mm)"
C7 C11: library part CGB2A1X5R1E105K033BC, "CAP CER 1UF 25V X5R 0402", Supplier Part Number 1=445-13185-1-ND, Supplier 1=Digi-Key, Supplier 2=Mouser, Supplier Part Number 2=810-CGB2A1X5R1E105BC
C8: library part "0402 DNP JUMPER"
C9: library part GRM1885C1H562JA01D, "Multilayer Ceramic Capacitors MLCC - SMD/SMT 0603 5,600pF 50volts C0G +/-5%", Capacitance=5.6nF, Case/Package=0603, Case Code (Metric)=1608, Dielectric=C0G, Manufacturer=Murata, Max Operating Temperature=125°C, Min Operating Temperature=-55°C, Package Quantity=4000, Supplier Part Number 1=490-11471-1-ND, Tolerance=5%, Voltage Rating=50V, Case Code (Imperial)=0603, ComponentLink1Description=http://search.murata.co.jp/Ceramy/image/img/A01X/partnumbering_e_01.pdf, ComponentLink1URL=http://search.murata.co.jp/Ceramy/image/img/A01X/partnumbering_e_01.pdf, Depth=0.8mm, Height=0.8mm, Lead Free="Lead Free", Lead Pitch=0.5mm, Length=1.6mm, Manufacturer Part Number=GRM1885C1H562JA01D, Mount="Surface Mount", Packaging="Tape and Reel", Pricing 1="1=0.19, 10=0.135, 100=0.0635, 500=0.04454, 1000=0.03687 (USD)", Stock 1=40000, Supplier 1=Digi-Key, Termination=SMD/SMT, Thickness=0.035inch, Voltage Rating (DC)=50V, Width=0.031inch
C12: library part C0603C101JAGACTU, "CAP CER 100PF 250V C0G/NP0 0603", Capacitance=100pF, Case/Package=0603, Dielectric Material=Ceramic, Manufacturer=KEMET, Supplier Part Number 1=399-14933-1-ND, Tolerance=5%, Voltage Rating (DC)=250V, Lead Free="Lead Free", Manufacturer Part Number=C0603C101JAGACTU, Pricing 1="1=0.56, 10=0.397, 100=0.2612, 500=0.1935, 1000=0.16448 (USD)", Pricing 2="1=0.54, 10=0.313, 50=0.313, 100=0.189, 1000=0.155, 10000=0.135 (USD)", Stock 1=7181, Stock 2=0, Supplier 1=Digi-Key, Supplier 2=Mouser, Supplier Part Number 2=80-C0603C101JAG
C13: library part AC0402KRX7R7BB104, "CAP CER 0.1UF 16V X7R 0402", Manufacturer=Yageo, Operating Temperature="-55°C ~ 125°C", Package / Case="0402 (1005 Metric)", Ratings=AEC-Q200, Supplier Part Number 1=311-3026-1-ND, Temperature Coefficient=X7R, Tolerance=±10%, Voltage - Rated=16V, Applications=Automotive, Category=Capacitors, ComponentLink1Description=http://www.yageo.com/documents/recent/UPY-AC_NP0X7R_16V-to-630V_11.pdf, ComponentLink1URL=http://www.yageo.com/documents/recent/UPY-AC_NP0X7R_16V-to-630V_11.pdf, Failure Rate=-, Features=-, Height - Seated (Max)=-, Lead Spacing=-, Lead Style=-, Manufacturer Part Number=AC0402KRX7R7BB104, Mounting Type="Surface Mount, MLCC", Packaging="Cut Tape (CT)", Part Status=Active, Pricing 1="1=0.1, 10=0.068, 100=0.0304, 500=0.02174, 1000=0.01708, 2500=0.01553, 5000=0.01429 (USD)", RoHS="RoHS Compliant", Size / Dimension="0.039\" L x 0.020\" W (1.00mm x 0.50mm)", Stock 1=29133, Supplier 1=Digi-Key, Thickness (Max)="0.022\" (0.55mm)"
C14: library part AC0402KRX7R7BB473, "CAP CER 0.047UF 16V X7R 0402", Manufacturer=Yageo, Operating Temperature="-55°C ~ 125°C", Package / Case="0402 (1005 Metric)", Ratings=AEC-Q200, Supplier Part Number 1=311-3064-1-ND, Temperature Coefficient=X7R, Tolerance=±10%, Voltage - Rated=16V, Applications=Automotive, Category=Capacitors, ComponentLink1Description=http://www.yageo.com/documents/recent/UPY-AC_NP0X7R_16V-to-630V_11.pdf, ComponentLink1URL=http://www.yageo.com/documents/recent/UPY-AC_NP0X7R_16V-to-630V_11.pdf, Failure Rate=-, Features=-, Height - Seated (Max)=-, Lead Spacing=-, Lead Style=-, Manufacturer Part Number=AC0402KRX7R7BB473, Mounting Type="Surface Mount, MLCC", Packaging="Cut Tape (CT)", Part Status=Active, Pricing 1="1=0.13, 10=0.093, 100=0.0416, 500=0.0297, 1000=0.02334, 2500=0.02122, 5000=0.01952 (USD)", RoHS="RoHS Compliant", Size / Dimension="0.039\" L x 0.020\" W (1.00mm x 0.50mm)", Stock 1=7700, Supplier 1=Digi-Key, Thickness (Max)="0.022\" (0.55mm)"
C15 C16: library part CC0402FRNPO9BN120, "CAP CER 12PF 50V C0G/NPO 0402", Manufacturer=Yageo, Operating Temperature="-55°C ~ 125°C", Package / Case="0402 (1005 Metric)", Ratings=-, Supplier Part Number 1=311-1641-1-ND, Temperature Coefficient="C0G, NP0", Tolerance=±1%, Voltage - Rated=50V, Applications="General Purpose", Category=Capacitors, ComponentLink1Description=http://www.yageo.com/documents/recent/UPY-GP_NP0_16V-to-50V_16.pdf, ComponentLink1URL=http://www.yageo.com/documents/recent/UPY-GP_NP0_16V-to-50V_16.pdf, Failure Rate=-, Features=-, Height - Seated (Max)=-, Lead Spacing=-, Lead Style=-, Manufacturer Part Number=CC0402FRNPO9BN120, Mounting Type="Surface Mount, MLCC", Notification="Current market demand for these product types have resulted in fluctuating and extending lead times. Lead times may differ.", Packaging="Cut Tape (CT)", Part Status=Active, Pricing 1="1=0.14, 10=0.104, 100=0.0464, 500=0.03312, 1000=0.02603, 2500=0.02366, 5000=0.02177 (USD)", RoHS="RoHS Compliant", Size / Dimension="0.039\" L x 0.020\" W (1.00mm x 0.50mm)", Stock 1=100000, Supplier 1=Digi-Key, Thickness (Max)="0.022\" (0.55mm)"
C19: library part GRM188R61C106KAALD, "Multilayer Ceramic Capacitors MLCC - SMD/SMT 0603 10uF 16volts X5R 10%", Capacitance=10uF, Case/Package=0603, Case Code (Metric)=1608, Dielectric=X5R, Manufacturer=Murata, Max Operating Temperature=85°C, Min Operating Temperature=-55°C, Package Quantity=4000, Supplier Part Number 1=490-10728-1-ND, Tolerance=10%, Voltage Rating=16V, Case Code (Imperial)=0603, Composition=Ceramic, Height=0.8mm, Lead Free="Lead Free", Length=0.063inch, Manufacturer Part Number=GRM188R61C106KAALD, Mount="Surface Mount", Packaging="Tape and Reel", Pricing 1="1=0.49, 10=0.339, 100=0.2036, 500=0.15266, 1000=0.12892 (USD)", REACH SVHC="No SVHC", Stock 1=0, Supplier 1=Digi-Key, Termination=SMD/SMT, Thickness=0.037inch, Voltage Rating (DC)=16V, Weight=0.000222oz, Width=0.8mm
C20: library part CL10B105MO8NNWC, "CAP CER 1UF 16V X7R 0603", Manufacturer="Samsung Electro-Mechanics", Operating Temperature="-55°C ~ 125°C", Package / Case="0603 (1608 Metric)", Ratings=-, Supplier Part Number 1=1276-6524-1-ND, Temperature Coefficient=X7R, Tolerance=±20%, Voltage - Rated=16V, Applications="General Purpose", Category=Capacitors, ComponentLink1Description=http://www.samsungsem.com/kr/support/product-search/mlcc/CL10B105MO8NNWC.jsp, ComponentLink1URL=http://www.samsungsem.com/kr/support/product-search/mlcc/CL10B105MO8NNWC.jsp, Features=-, Height - Seated (Max)=-, Lead Spacing=-, Lead Style=-, Manufacturer Part Number=CL10B105MO8NNWC, Mounting Type="Surface Mount, MLCC", Notification="Current market demand for these product types have resulted in fluctuating and extending lead times. Lead times may differ.", Packaging="Cut Tape (CT)", Part Status=Active, Pricing 1="1=0.1, 10=0.043, 100=0.0194, 500=0.01406, 1000=0.01121 (USD)", RoHS="RoHS Compliant", Size / Dimension="0.063\" L x 0.031\" W (1.60mm x 0.80mm)", Stock 1=40000, Supplier 1=Digi-Key, Thickness (Max)="0.035\" (0.90mm)"
D1: "DIODE SCHOTTKY 200V 2A SOD123", Average Rectified Current=2A, Manufacturer="ON Semiconductor", Manufacturer Part Number=MBR2H200SFT3G, Max Reverse Voltage (DC)=200V, Supplier Part Number 1=MBR2H200SFT3GOSCT-ND, Lead Free="Lead Free", Mount="Surface Mount", Packaging="Tape and Reel", Pricing 1="1=0.44, 10=0.328, 100=0.1857, 500=0.12298, 1000=0.09428 (USD)", Stock 1=78470, Supplier 1=Digi-Key
D2: "DIODE SCHOTTKY 30V 200MA SOD523F", Average Rectified Current=200mA, Forward Voltage=500mV, Manufacturer="ON Semiconductor / Fairchild", Max Operating Temperature=125°C, Max Repetitive Reverse Voltage (Vrrm)=30V, Max Reverse Leakage Current=30uA, Min Operating Temperature=-55°C, Package Quantity=1, Power Dissipation=200mW, Supplier Part Number 1=RB521S30CT-ND, ComponentLink1Description=http://www.fairchildsemi.com/ds/RB/RB521S30.pdf, ComponentLink1URL=http://www.fairchildsemi.com/ds/RB/RB521S30.pdf, ComponentLink2Description=https://www.fairchildsemi.com/datasheets/RB/RB521S30.pdf, ComponentLink2URL=https://www.fairchildsemi.com/datasheets/RB/RB521S30.pdf, ComponentLink3Description=https://www.verical.com/server-webapp/html/getDatasheet?partID=71229, ComponentLink3URL=https://www.verical.com/server-webapp/html/getDatasheet?partID=71229, Element Configuration=Single, Forward Current=200mA, Height=0.7mm, Lead Free="Lead Free", Length=1.3mm, Manufacturer Part Number=RB521S30, Max Reverse Voltage (DC)=30V, Mount="Surface Mount", Number of Pins=2, Packaging="Tape and Reel", Peak Reverse Current=30uA, Pricing 1="1=0.23, 10=0.191, 100=0.1011, 500=0.0665, 1000=0.04522 (USD)", Radiation Hardening=No, REACH SVHC="No SVHC", Stock 1=44826, Supplier 1=Digi-Key, Weight=0.01g, Width=0.9mm
H1 H2 H3 H4: "M3 x 0.5mm plated tight fit pan head"
J1: "HIROSE(HRS)         ZX62R-B-5P(30)             USB Connector, Micro USB Type B, USB 2.0, Receptacle, 5 Ways, Surface Mount, Right Angle", Manufacturer=Hirose, Supplier Part Number 1=H125274CT-ND, Connector Type=USB, Contact Material="Copper Alloy", Contact Plating=Gold, Gender=Receptacle, Lead Free="Lead Free", Manufacturer Part Number=ZX62R-B-5P(30), Mount="Horizontal,Surface Mount", Number of Contacts=5, Orientation="Right Angle", Packaging="Tape and Reel", Pricing 1="1=1.02, 10=0.898, 25=0.8448, 50=0.8096, 100=0.7744, 250=0.704, 500=0.6336, 1000=0.5632 (USD)", REACH SVHC=Unknown, Stock 1=50674, Supplier 1=Digi-Key, USB Standard="USB 2.0"
J2: "CONN TERM BLOCK 3 POS WTB", Colour=White, Current=6A, Manufacturer=Kyocera, Max Operating Temperature=125°C, Max Supply Voltage (AC)=250V, Min Operating Temperature=-40°C, Package Quantity=1, Supplier Part Number 1=478-6170-1-ND, ComponentLink1Description=https://media.digikey.com/pdf/Data%20Sheets/AVX%20PDFs/00927600x021x06_Spec.PDF, ComponentLink1URL=https://media.digikey.com/pdf/Data%20Sheets/AVX%20PDFs/00927600x021x06_Spec.PDF, ComponentLink2Description=http://www.farnell.com/datasheets/2003050.pdf, ComponentLink2URL=http://www.farnell.com/datasheets/2003050.pdf, ComponentLink3Description=http://www.avx.com/docs/Catalogs/9276.pdf, ComponentLink3URL=http://www.avx.com/docs/Catalogs/9276.pdf, ComponentLink4Description=//media.digikey.com/pdf/Data%20Sheets/AVX%20PDFs/00927600x021x06_Spec.PDF, ComponentLink4URL=//media.digikey.com/pdf/Data%20Sheets/AVX%20PDFs/00927600x021x06_Spec.PDF, Contact Material="Copper,Copper Alloy", Contact Plating=Tin, Depth=9mm, Gender=Receptacle, Height=5mm, Housing Colour=White, Housing Material=Nylon, Lead Free="Lead Free", Length=9mm, Manufacturer Part Number=009276003021106, Max Voltage Rating (AC)=250V, Mount="Surface Mount,Through Hole", Number of Circuits=3, Number of Contacts=3, Number of Levels=1, Number of Positions=3, Number of Positions Per Level=3, Number of Rows=1, Orientation="Right Angle", Packaging="Tape and Reel", Pitch=2.5mm, Radiation Hardening=No, REACH SVHC="No SVHC", Stock 1=0, Supplier 1=Digi-Key, Termination=Solder, Voltage=250V, Voltage Rating=250V, Width=7.5mm, Wire Gauge (Max)=24AWG, Wire Gauge (Min)=18AWG
J3: "Headers & Wire Housings 4WAY POKE HOME VERTICAL TOP MOUNT", Colour=White, Current Rating=7A, Flammability Rating="UL94 V-0", Manufacturer="Kyocera AVX", Max Operating Temperature=125°C, Min Operating Temperature=-40°C, Package Quantity=400, Supplier Part Number 1=478-9323-1-ND, Voltage Rating=200V, Cable Pitch=0.157inch, ComponentLink1Description=http://datasheets.avx.com/PokeHomeVerticalTop_00-9296.pdf, ComponentLink1URL=http://datasheets.avx.com/PokeHomeVerticalTop_00-9296.pdf, Connector Type=Poke-In, Contact Gender=Female, Contact Material="Copper Alloy", Contact Plating=Tin, Housing Material=Nylon, Lead Free="Lead Free", Manufacturer Part Number=009296004553906, Mount="Surface Mount", Number of Positions=4, Number of Rows=1, Packaging="Tape and Reel", Pitch=4mm, Pricing 1="1=1.2, 10=1.057, 100=0.9123 (USD)", Stock 1=2302, Supplier 1=Digi-Key, Termination=SMD/SMT, Wire/Cable Gauge=18AWG, Wire Gauge (Max)=26AWG, Wire Gauge (Min)=18AWG
J4: "IDC BOX HEADER 0.050 10 POS", Manufacturer="CNC Tech", Package Quantity=3200, Supplier Part Number 1=1175-1629-ND, ComponentLink1Description=http://cnctech.us/idcmatching2.pdf, ComponentLink1URL=http://cnctech.us/idcmatching2.pdf, Connector Type="Male Pin", Contact Plating=Gold, Manufacturer Part Number=3220-10-0300-00, Mount="Surface Mount", Number of Positions=10, Number of Rows=2, Packaging=Tray, Pitch=0.05inch, Pricing 1="1=0.74, 10=0.69, 100=0.529, 500=0.46, 3200=0.345, 6400=0.3335, 12800=0.3059 (USD)", Row Spacing=0.05inch, Stock 1=193314, Supplier 1=Digi-Key, Termination=Solder
L1: library part VLS6045EX-100M, "FIXED IND 10UH 3.4A 61 MOHM SMD", Supplier Part Number 1=445-173039-1-ND, Supplier 1=Digi-Key, Supplier 2=Mouser, Supplier Part Number 2=810-VLS6045EX-100M
L2: library part SRU8043-150Y, "FIXED IND 15UH 2.7A 46 MOHM SMD", Case/Package=Nonstandard, Current Rating=2.7A, DC Resistance (DCR)=46mR, Inductance=15uh, Inductance Tolerance=30%, Manufacturer=Bourns, Max Operating Temperature=125°C, Min Operating Temperature=-40°C, Package Quantity=1000, Saturation Current=2A, Self Resonant Frequency=15MHz, Supplier Part Number 1=SRU8043-150YCT-ND, Test Frequency=100kHz, ComponentLink1Description=http://www.bourns.com/docs/Product-Datasheets/SRU8043.pdf, ComponentLink1URL=http://www.bourns.com/docs/Product-Datasheets/SRU8043.pdf, ComponentLink2Description=http://www.farnell.com/datasheets/70887.pdf, ComponentLink2URL=http://www.farnell.com/datasheets/70887.pdf, ComponentLink3Description=http://www.mouser.com/ds/2/54/RU8043-778433.pdf, ComponentLink3URL=http://www.mouser.com/ds/2/54/RU8043-778433.pdf, ComponentLink4Description=http://www.farnell.com/datasheets/1776933.pdf, ComponentLink4URL=http://www.farnell.com/datasheets/1776933.pdf, ComponentLink5Description=http://uk.rs-online.com/webdocs/0dd1/0900766b80dd1166.pdf, ComponentLink5URL=http://uk.rs-online.com/webdocs/0dd1/0900766b80dd1166.pdf, ComponentLink6Description=http://www.bourns.com/pdfs/SRU8043.pdf, ComponentLink6URL=http://www.bourns.com/pdfs/SRU8043.pdf, Composition=Wirewound, Core Material=Ferrite, DC Current=2.7A, Depth=8.3mm, Height=4.3mm, Height - Seated (Max)=0.181inch, Length=8mm, Manufacturer Part Number=SRU8043-150Y, Max DC Current=2.7A, Military Standard=Not, Mount="Surface Mount", Packaging="Tape and Reel", Pricing 1="1=0.97, 10=0.897, 100=0.6486, 500=0.4968 (USD)", Q Factor=26, REACH SVHC="No SVHC", RMS Current (Irms)=2.7A, Shielding=Shielded, Stock 1=6452, Supplier 1=Digi-Key, Termination=SMD/SMT, Tolerance=30%, Width=0.315inch
Q1: library part BSZ900N20NS3GATMA1, "Trans MOSFET N-CH 200V 15.2A 8-Pin TSDSON", Continuous Drain Current (ID)=15.2A, Drain to Source Voltage (Vdss)=200V, Gate to Source Voltage (Vgs)=20V, Manufacturer=Infineon, Max Operating Temperature=150°C, Min Operating Temperature=-55°C, Power Dissipation=62.5W, Supplier Part Number 1=BSZ900N20NS3GATMA1CT-ND, ComponentLink1Description=http://www.infineon.com/dgdl/BSZ900N20NS3+Rev2.2.pdf?folderId=db3a304325305e6d012596c6ca7b290a&fileId=db3a30432ad629a6012b15f1be561a9b, ComponentLink1URL=http://www.infineon.com/dgdl/BSZ900N20NS3+Rev2.2.pdf?folderId=db3a304325305e6d012596c6ca7b290a&fileId=db3a30432ad629a6012b15f1be561a9b, Contact Plating=Tin, Fall Time=3ns, Halogen Free="Halogen Free", Lead Free="Contains Lead", Manufacturer Part Number=BSZ900N20NS3GATMA1, Max Dual Supply Voltage=200V, Mount="Surface Mount", Number of Elements=1, Number of Pins=8, Pricing 1="1=1.84, 10=1.665, 100=1.3378, 500=1.04054, 1000=0.86216 (USD)", Rise Time=4ns, Stock 1=334, Supplier 1=Digi-Key, Turn-Off Delay Time=10ns, Turn-On Delay Time=5ns
Q2: "MOSFET PCH 1.8V DRIVE SERIES", Case/Package=SMD/SMT, Continuous Drain Current (ID)=9A, Drain to Source Breakdown Voltage=-12V, Drain to Source Resistance=16.9mR, Drain to Source Voltage (Vdss)=12V, Gate to Source Voltage (Vgs)=10V, Input Capacitance=2.2nF, Manufacturer="ON Semiconductor", Max Operating Temperature=150°C, Max Power Dissipation=1.5W, Min Operating Temperature=-55°C, Package Quantity=3000, Supplier Part Number 1=MCH6351-TL-WOSCT-ND, ComponentLink1Description=http://www.onsemi.com/pub_link/Collateral/ENA2198-D.PDF, ComponentLink1URL=http://www.onsemi.com/pub_link/Collateral/ENA2198-D.PDF, ComponentLink2Description=http://www.mouser.com/ds/2/308/ENA2198-D-278502.pdf, ComponentLink2URL=http://www.mouser.com/ds/2/308/ENA2198-D-278502.pdf, Element Configuration=Single, Fall Time=122ns, Halogen Free="Halogen Free", Lead Free="Lead Free", Manufacturer Part Number=MCH6351-TL-W, Number of Channels=1, Number of Pins=6, Packaging="Tape and Reel", Pricing 1="1=0.59, 10=0.499, 100=0.3739, 500=0.27418, 1000=0.21187 (USD)", Radiation Hardening=No, Rds On Max=16.9mR, Rise Time=89ns, Stock 1=2960, Supplier 1=Digi-Key, Turn-Off Delay Time=260ns, Turn-On Delay Time=12.3ns, Weight=0.000265oz
Q3: "Trans MOSFET N-CH 20V 3.8A 3-Pin SC-59 T/R", Case/Package=SC, Continuous Drain Current (ID)=3.8A, Drain to Source Voltage (Vdss)=20V, Gate to Source Voltage (Vgs)=12V, Manufacturer=Infineon, Manufacturer Part Number=BSR202NL6327HTSA1, Max Operating Temperature=150°C, Min Operating Temperature=-55°C, Supplier Part Number 1=BSR202NL6327HTSA1CT-ND, ComponentLink1Description=http://www.infineon.com/dgdl/BSR202N_Rev1.05.pdf?folderId=db3a3043156fd573011622e10b5c1f67&fileId=db3a3043156fd573011622e5576e1f72, ComponentLink1URL=http://www.infineon.com/dgdl/BSR202N_Rev1.05.pdf?folderId=db3a3043156fd573011622e10b5c1f67&fileId=db3a3043156fd573011622e5576e1f72, Contact Plating=Tin, Max Dual Supply Voltage=20V, Mount="Surface Mount", Number of Pins=3, Pricing 1="1=0.54, 10=0.455, 100=0.3416, 500=0.25052, 1000=0.19358 (USD)", Rise Time=16.7ns, Stock 1=17256, Supplier 1=Digi-Key
Q4 Q5: "N-Channel OptiMOS(TM)-3 Small-Signal-Transistor, 60 V VDS, 2.3 A ID, -55 to 150 degC, PG-SC59, Reel, Green", Case/Package=SC, Continuous Drain Current (ID)=2.3A, Drain to Source Resistance=60mR, Drain to Source Voltage (Vdss)=60V, Gate to Source Voltage (Vgs)=20V, Input Capacitance=657pF, Manufacturer=Infineon, Manufacturer Part Number=BSR606NH6327XTSA1, Max Operating Temperature=150°C, Max Power Dissipation=500mW, Min Operating Temperature=-55°C, Package Quantity=3000, Supplier Part Number 1=BSR606NH6327XTSA1CT-ND, Threshold Voltage=1.8V, ComponentLink1Description="Manufacturer URL", ComponentLink1URL=http://www.infineon.com/, ComponentLink2Description=Datasheet, ComponentLink2URL=http://www.infineon.com/dgdl/BSR606N_2+3.pdf?folderId=db3a3043156fd573011622e10b5c1f67&fileId=db3a30433e78ea82013e7ea9a659062b, ComponentLink3Description="Package Specification", ComponentLink3URL=http://www.infineon.com/dgdl/SC59-Package_Overview.pdf?folderId=db3a30431936bc4b01194dc0d34440b0&fileId=db3a30431936bc4b01194dd1aa1d40cf, DatasheetVersion="Rev. 2.3", Element Configuration=Single, Green=TRUE, Halogen-free=TRUE, Halogen Free="Halogen Free", ID (max)="2.3 A", IDpuls (max)="9.1 A", Lead Free="Lead Free", Max Dual Supply Voltage=60V, Mode=Enhancement, Mount="Surface Mount", Mounting=SMD, Mounting Technology="Surface Mount", Number of Elements=1, Number of Pins=59, PackageDescription="3-Pin Semiconductor Package, 3 x 1.53 mm Body, 0.95 mm Pitch", PackageReference=PG-SC59, PackageVersion=Mar-08, Packaging="Tape and Reel", Packing=Reel, PartNumber=BSR606N, Polarity=FALSE, Power Dissipation=500mW, Pricing 1="1=0.61, 10=0.517, 100=0.3875, 500=0.28416, 1000=0.21958 (USD)", Ptot (max)="0.5 W", QG="3.7 nC", Rds On Max=60mR, REACH SVHC="No SVHC", RthJA (max)="250 K/W", Stock 1=131, Supplier 1=Digi-Key, VDS (max)="60 V", VGS(th) (max)="2.3 V", VGS(th) (min)="1.3 V"
R1: library part CPF0805B1M5E1, "RES SMD 1.5M OHM 0.1% 1/10W 0805", Manufacturer="TE Connectivity Passive Product", Operating Temperature="-55°C ~ 155°C", Package / Case="0805 (2012 Metric)", Power (Watts)="0.1W, 1/10W", Supplier Device Package=0805, Supplier Part Number 1=A103799CT-ND, Temperature Coefficient=±25ppm/°C, Tolerance=±0.1%, Category=Resistors, ComponentLink1Description=http://www.te.com/commerce/DocumentDelivery/DDEController?Action=srchrtrv&DocNm=1773200&DocType=DS&DocLang=English, ComponentLink1URL=http://www.te.com/commerce/DocumentDelivery/DDEController?Action=srchrtrv&DocNm=1773200&DocType=DS&DocLang=English, Composition="Thin Film", Failure Rate=-, Features=-, Height - Seated (Max)="0.026\" (0.65mm)", Manufacturer Part Number=CPF0805B1M5E1, Packaging="Cut Tape (CT)", Part Status=Active, Pricing 1="1=0.55, 10=0.394, 100=0.2047 (USD)", RoHS="RoHS Compliant", Size / Dimension="0.079\" L x 0.049\" W (2.00mm x 1.25mm)", Stock 1=27374, Supplier 1=Digi-Key, Supplier 2=Mouser, Supplier Part Number 2=279-CPF0805B1M5E1
R2: library part RL0402FR-070R5L, "RES 0.5 OHM 1% 1/16W 0402", Manufacturer=Yageo, Manufacturer Part Number=RC0402FR-071RL, Operating Temperature="-55°C ~ 155°C", Package / Case="0402 (1005 Metric)", Power (Watts)="0.063W, 1/16W", Supplier Device Package=0402, Supplier Part Number 1=311-.5PCT-ND, Temperature Coefficient=±200ppm/°C, Tolerance=±1%, Category=Resistors, ComponentLink1Description=http://www.yageo.com/documents/recent/PYu-RC_Group_51_RoHS_L_9.pdf, ComponentLink1URL=http://www.yageo.com/documents/recent/PYu-RC_Group_51_RoHS_L_9.pdf, Composition="Thick Film", Failure Rate=-, Features="Moisture Resistant", Height - Seated (Max)="0.016\" (0.40mm)", Packaging="Cut Tape (CT)", Part Status=Active, RoHS="RoHS Compliant", Size / Dimension="0.039\" L x 0.020\" W (1.00mm x 0.50mm)", Supplier 1=Digi-Key, Supplier 2=Mouser, Supplier Part Number 2=603-RL0402FR070R5L
R3: library part RL0402FR-070R22L, "RES 0.22 OHM 1% 1/16W 0402", Manufacturer=Yageo, Manufacturer Part Number=RC0402FR-071RL, Operating Temperature="-55°C ~ 155°C", Package / Case="0402 (1005 Metric)", Power (Watts)="0.063W, 1/16W", Supplier Device Package=0402, Supplier Part Number 1=311-.22PCT-ND, Temperature Coefficient=±200ppm/°C, Tolerance=±1%, Category=Resistors, ComponentLink1Description=http://www.yageo.com/documents/recent/PYu-RC_Group_51_RoHS_L_9.pdf, ComponentLink1URL=http://www.yageo.com/documents/recent/PYu-RC_Group_51_RoHS_L_9.pdf, Composition="Thick Film", Failure Rate=-, Features="Moisture Resistant", Height - Seated (Max)="0.016\" (0.40mm)", Packaging="Cut Tape (CT)", Part Status=Active, RoHS="RoHS Compliant", Size / Dimension="0.039\" L x 0.020\" W (1.00mm x 0.50mm)", Supplier 1=Digi-Key, Supplier 2=Mouser, Supplier Part Number 2=603-RL0402FR-070R22L
R4: library part RT0805BRD0712K7L, "RES SMD 12.7K OHM 0.1% 1/8W 0805", Manufacturer=Yageo, Operating Temperature="-55°C ~ 155°C", Package / Case="0805 (2012 Metric)", Power (Watts)="0.125W, 1/8W", Supplier Device Package=0805, Supplier Part Number 1=YAG1775CT-ND, Temperature Coefficient=±25ppm/°C, Tolerance=±0.1%, Category=Resistors, ComponentLink1Description=http://www.yageo.com/documents/recent/PYu-RT_1-to-0.01_RoHS_L_9.pdf, ComponentLink1URL=http://www.yageo.com/documents/recent/PYu-RT_1-to-0.01_RoHS_L_9.pdf, Composition="Thin Film", Failure Rate=-, Features=-, Height - Seated (Max)="0.024\" (0.60mm)", Manufacturer Part Number=RT0805BRD0712K7L, Packaging="Cut Tape (CT)", Part Status=Active, Pricing 1="1=0.4, 10=0.285, 100=0.1139, 1000=0.05612, 2500=0.05199 (USD)", RoHS="RoHS Compliant", Size / Dimension="0.079\" L x 0.049\" W (2.00mm x 1.25mm)", Stock 1=19760, Supplier 1=Digi-Key, Supplier 2=Mouser, Supplier Part Number 2=603-RT0805BRD0712K7L
R5: library part UCR03EWPFSR039, "RES SMD 0.039 OHM 1% 1/4W 0603", Case/Package=0603, Case Code (Metric)=1608, Manufacturer=Rohm, Max Operating Temperature=155°C, Max Power Dissipation=250mW, Min Operating Temperature=-55°C, Package Quantity=5000, Resistance=39mR, Supplier Part Number 1=RHM1271CT-ND, Temperature Coefficient=250ppm/°C, Tolerance=1%, Case Code (Imperial)=0603, ComponentLink1Description=http://www.rohm.com/web/global/datasheet/UCR10EVHJS/ucr-e, ComponentLink1URL=http://www.rohm.com/web/global/datasheet/UCR10EVHJS/ucr-e, ComponentLink2Description=https://www.rohm.com/datasheet/UCR10EVHJS/ucr-e, ComponentLink2URL=https://www.rohm.com/datasheet/UCR10EVHJS/ucr-e, Composition="Thick Film", Height=0.024inch, Lead Free="Lead Free", Length=0.063inch, Manufacturer Part Number=UCR03EWPFSR039, Number of Terminations=2, Packaging="Tape and Reel", Pricing 1="1=0.61, 10=0.505, 25=0.4332, 50=0.3898, 100=0.3393, 250=0.3032, 500=0.24544, 1000=0.19852 (USD)", Stock 1=4314, Supplier 1=Digi-Key, Width=0.034inch
R6: library part RC0402FR-0720RL, "RES SMD 20 OHM 1% 1/16W 0402", Manufacturer=Yageo, Operating Temperature="-55°C ~ 155°C", Package / Case="0402 (1005 Metric)", Power (Watts)="0.063W, 1/16W", Supplier Device Package=0402, Supplier Part Number 1=311-20LRCT-ND, Temperature Coefficient=±100ppm/°C, Tolerance=±1%, Category=Resistors, ComponentLink1Description=http://www.yageo.com/documents/recent/PYu-RC_Group_51_RoHS_L_9.pdf, ComponentLink1URL=http://www.yageo.com/documents/recent/PYu-RC_Group_51_RoHS_L_9.pdf, Composition="Thick Film", Failure Rate=-, Features="Moisture Resistant", Height - Seated (Max)="0.016\" (0.40mm)", Manufacturer Part Number=RC0402FR-0720RL, Packaging="Cut Tape (CT)", Part Status=Active, Pricing 1="1=0.1, 10=0.021, 100=0.0083, 1000=0.00375, 2500=0.00325, 5000=0.00269 (USD)", RoHS="RoHS Compliant", Size / Dimension="0.039\" L x 0.020\" W (1.00mm x 0.50mm)", Stock 1=512120, Supplier 1=Digi-Key, Supplier 2=Mouser, Supplier Part Number 2=603-RC0402FR-0720RL
R7 R15: library part RC0402FR-07180KL, "RES SMD 180K OHM 1% 1/16W 0402", Manufacturer=Yageo, Operating Temperature="-55°C ~ 155°C", Package / Case="0402 (1005 Metric)", Power (Watts)="0.063W, 1/16W", Supplier Device Package=0402, Supplier Part Number 1=311-180KLRCT-ND, Temperature Coefficient=±100ppm/°C, Tolerance=±1%, Category=Resistors, ComponentLink1Description=http://www.yageo.com/documents/recent/PYu-RC_Group_51_RoHS_L_9.pdf, ComponentLink1URL=http://www.yageo.com/documents/recent/PYu-RC_Group_51_RoHS_L_9.pdf, Composition="Thick Film", Failure Rate=-, Features="Moisture Resistant", Height - Seated (Max)="0.016\" (0.40mm)", Manufacturer Part Number=RC0402FR-07180KL, Packaging="Cut Tape (CT)", Part Status=Active, Pricing 1="1=0.1, 10=0.018, 100=0.0076, 1000=0.00356, 2500=0.00313, 5000=0.00263 (USD)", RoHS="RoHS Compliant", Size / Dimension="0.039\" L x 0.020\" W (1.00mm x 0.50mm)", Stock 1=0, Supplier 1=Digi-Key
R8: library part RC0402FR-074K3L, "RES SMD 4.3K OHM 1% 1/16W 0402", Case/Package=0402, Case Code (Metric)=1005, Manufacturer=Yageo, Max Operating Temperature=155°C, Min Operating Temperature=-55°C, Power Rating=63mW, Resistance=4.3kR, Supplier Part Number 1=311-4.30KLRCT-ND, Temperature Coefficient=100ppm/°C, Tolerance=1%, Voltage Rating=50V, Case Code (Imperial)=0402, ComponentLink1Description=http://www.farnell.com/datasheets/2167052.pdf, ComponentLink1URL=http://www.farnell.com/datasheets/2167052.pdf, ComponentLink2Description=http://www.yageo.com/documents/recent/PYu-RC0402_51_RoHS_L_6.pdf, ComponentLink2URL=http://www.yageo.com/documents/recent/PYu-RC0402_51_RoHS_L_6.pdf, ComponentLink3Description=http://www.mouser.com/ds/2/447/PYu-RC0402_51_RoHS_L_6_r-8721.pdf, ComponentLink3URL=http://www.mouser.com/ds/2/447/PYu-RC0402_51_RoHS_L_6_r-8721.pdf, ComponentLink4Description=http://www.yageo.com/documents/recent/PYu-RC0402_51_RoHS_L_6_r.pdf, ComponentLink4URL=http://www.yageo.com/documents/recent/PYu-RC0402_51_RoHS_L_6_r.pdf, Composition="Thick Film", Contact Plating=Matte,Tin, Depth=0.5mm, Lead Free="Lead Free", Length=1mm, Manufacturer Part Number=RC0402FR-074K3L, Military Standard=Not, Packaging="Tape and Reel", Pricing 1="1=0.1, 10=0.016, 100=0.0067, 1000=0.00301, 2500=0.00261, 5000=0.00215 (USD)", REACH SVHC=Unknown, Stock 1=845971, Supplier 1=Digi-Key, Termination=SMD/SMT, Voltage Rating (DC)=50V